# EAGLE board quantum_PSU_V2_1 (EAGLE 9.5.2)
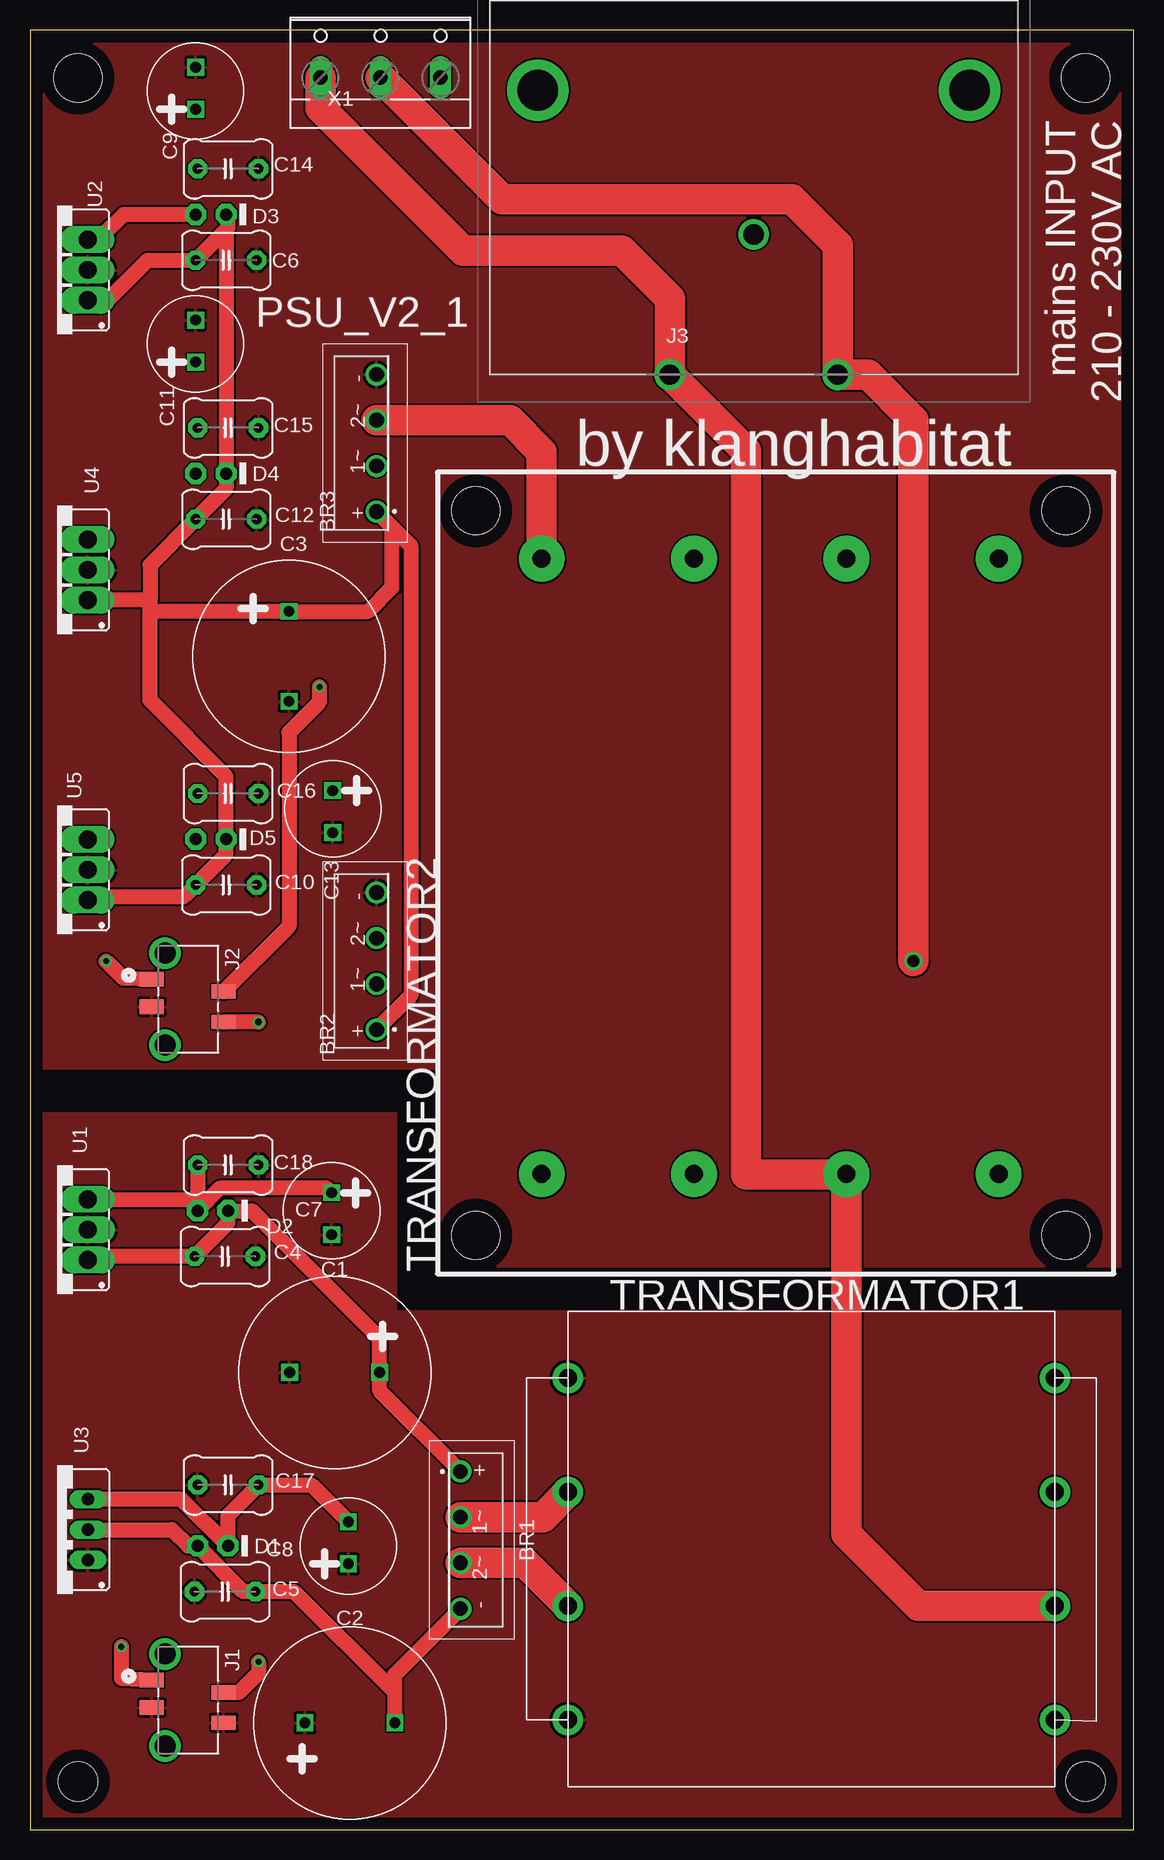
[diagram p0: board, top side]
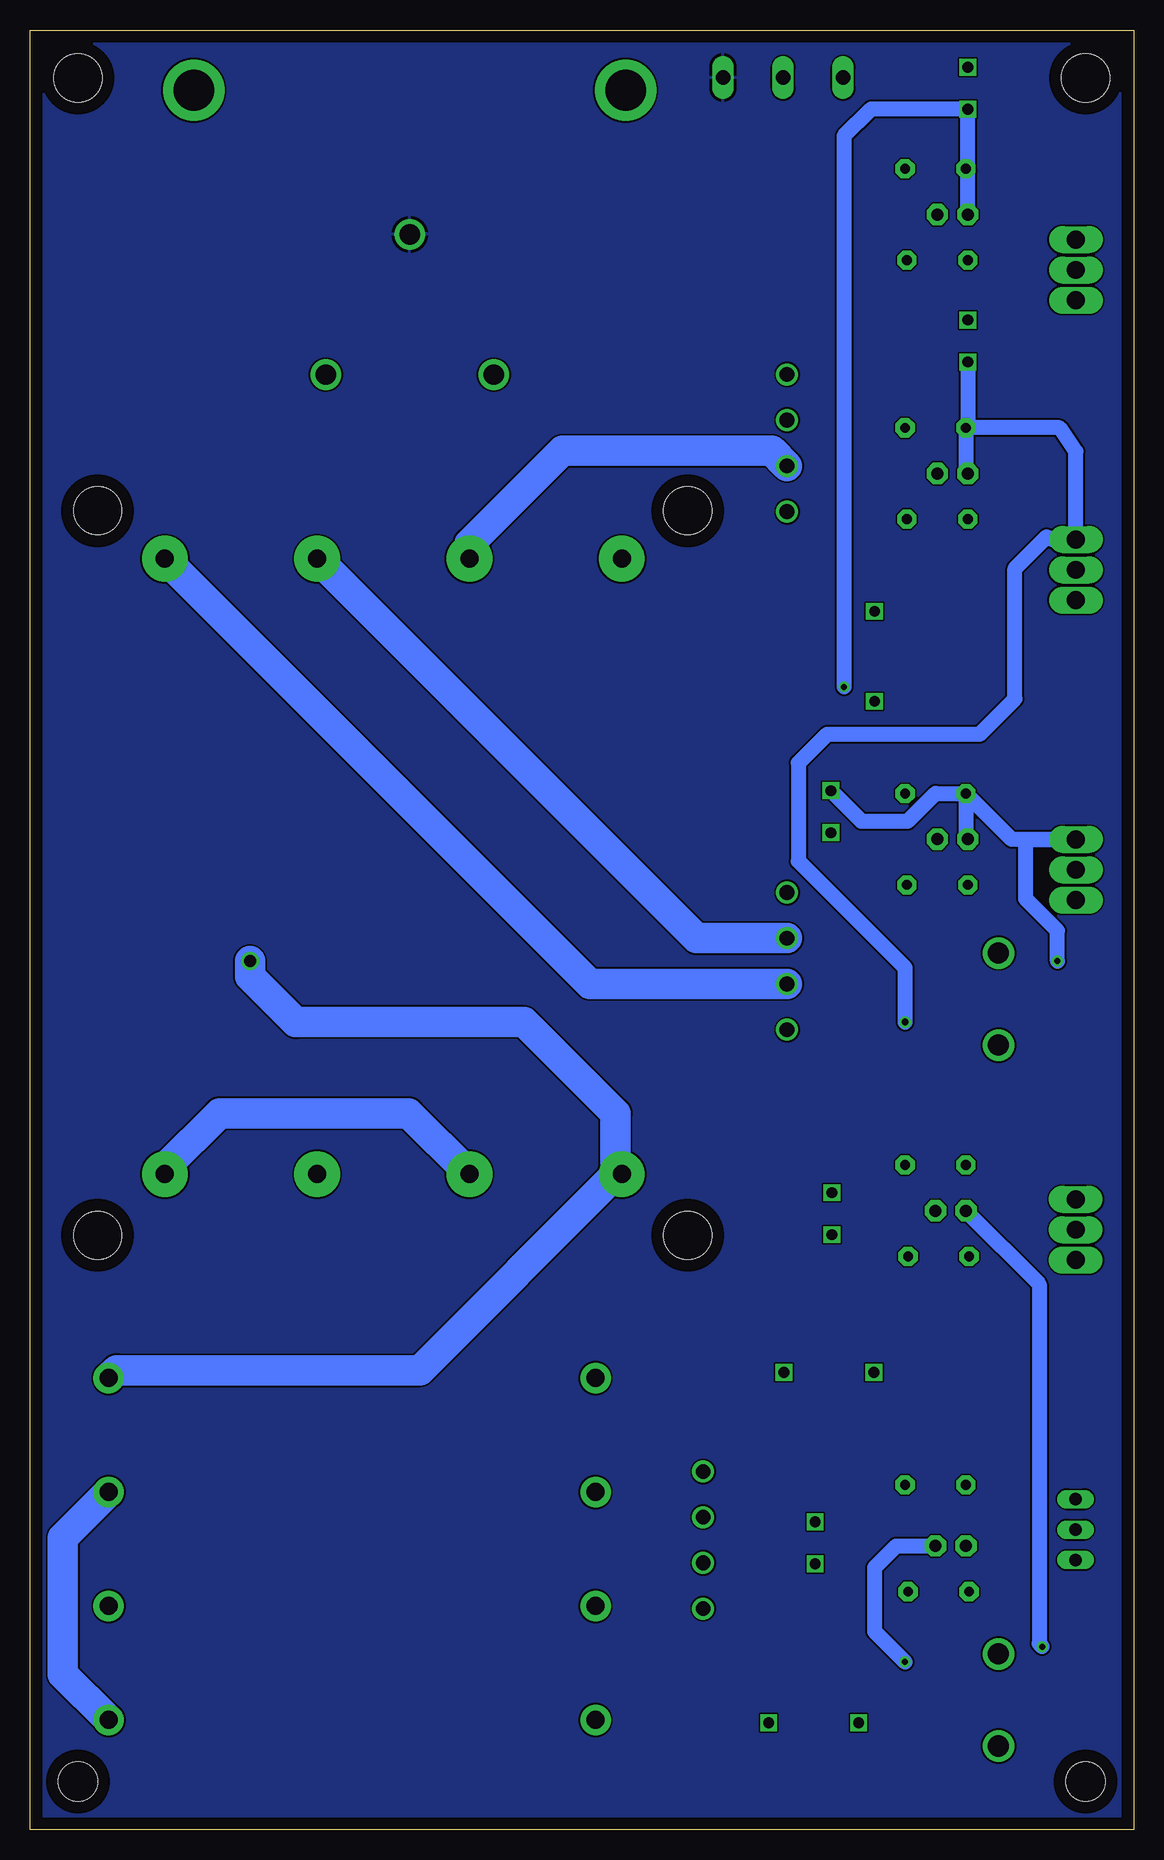
[diagram p1: board, bottom side, seen from below]

Size 92 x 150 mm. Coordinates in mm from the lower left corner, seen from the top.
Outline: 0,0 92,0 92,150 0,150 0,0
Copper layers (1*16): Top 0.035mm / dielectric 1.5mm / Bottom 0.035mm
Design rules "default *": minimum track width 6mil, minimum drill 0.35mm, track to track 6mil, track to pad 6mil, pad to pad 6mil, via to via 6mil, smd to smd 6mil, copper to edge 40mil, drill to drill 6mil, minimum pad ring 10mil, minimum via ring 8mil, stop-mask expansion 4mil, vias tented up to drill 0mil, thermal gap 10mil
Holes 3.3 mm at 4,4 88,4
Holes 4 mm at 4,146 88,146

## Footprints (pad centres in the part's own frame; a part is rotated, then mirrored left to right if it is on the bottom)
KBP308G = drill 1.22 pad 1.83: 1 -5.715,-0.95; 2 -1.905,-0.95; 3 1.905,-0.95; 4 5.715,-0.95
ELECTROLYTIC_16MM = drill 0.9 square: + -3.75,0; - 3.75,0
C5MM = drill 0.813 pad 1.6 octagon: 1 -1.27,0; 2 3.81,0
ELECTROLYTIC_8MM = drill 0.9 square: + -1.5,0; - 2,0
DIODE_THT_STANDING = drill 1 pad 1.778 octagon: A 0,0; C -2.54,0
MOLEX_90814-0204 = smd 1.194 x 2.007: 1 0.254,0; 2 1.27,5.994; 3 2.54,0; 4 3.81,5.994 | drill 1.753 pad 2.629: 5 -1.93,1.092; 6 5.74,1.092
PF0030PC = drill 1.7 pad 2.55: 1 0,0; 2 7,11.7; 3 14,0 | drill 3.4 pad 5.1: MH1 -11,23.7; MH2 25,23.7
LP_SIZE_6 = drill 1.5 pad 2.54: P$1 3.45,34.05; P$2 3.45,24.55; P$3 3.45,15.05; P$4 3.45,5.55; P$5 44.05,34.05; P$6 44.05,24.55; P$7 44.05,15.05; P$8 44.05,5.55
LPI_SIZE_18 = drill 1.5 pad 3.81: P$1 5.1,5.6; P$2 5.1,18.3; P$3 5.1,43.7; P$4 5.1,31; P$5 56.4,5.6; P$6 56.4,18.3; P$7 56.4,43.7; P$8 56.4,31 | hole 4: 0,0; 60.4,0; 0,49.2; 60.4,49.2
78XXS_ = drill 1.499 pad 1.93 long: GND 0,-2.54; IN -2.54,-2.54; OUT 2.54,-2.54
79XXS = drill 1.016 long: GND -2.54,-2.54; IN 0,-2.54; OUT 2.54,-2.54
W237-103 = drill 1.194 long: 1 -5,-1.29; 2 0,-1.29; 3 5,-1.29

## Placement (x,y rotation side)
BR1  BRIDGE_RECTIFIER  [KBP308G]  36.83,24.13 270 top
BR2  BRIDGE_RECTIFIER  [KBP308G]  27.94,72.39 90 top
BR3  BRIDGE_RECTIFIER  [KBP308G]  27.94,115.57 90 top
C1  4700 uF/25 V  [ELECTROLYTIC_16MM]  25.4,38.1 180 top
C2  4700 uF/25V  [ELECTROLYTIC_16MM]  26.67,8.89 0 top
C3  4700 uF/25 V  [ELECTROLYTIC_16MM]  21.59,97.79 270 top
C4  100 nF  [C5MM]  14.99,47.77 0 top
C5  100 nF  [C5MM]  14.99,19.83 0 top
C6  100 nF  [C5MM]  15.08,130.81 0 top
C7  100 uF/25V  [ELECTROLYTIC_8MM]  25.15,51.58 270 top
C8  100 uF/25V  [ELECTROLYTIC_8MM]  26.54,23.64 90 top
C9  100 uF/25V  [ELECTROLYTIC_8MM]  13.81,144.91 90 top
C10  100 nF  [C5MM]  15.08,78.74 0 top
C11  100 uF/25V  [ELECTROLYTIC_8MM]  13.81,123.83 90 top
C12  100 nF  [C5MM]  15.08,109.22 0 top
C13  100 uF/25V  [ELECTROLYTIC_8MM]  25.24,85.09 270 top
C14  100 nF  [C5MM]  15.24,138.43 0 top
C15  100 nF  [C5MM]  15.24,116.84 0 top
C16  100 nF  [C5MM]  15.24,86.36 0 top
C17  100 nF  [C5MM]  15.24,28.72 0 top
C18  100 nF  [C5MM]  15.24,55.39 0 top
D1  4148  [DIODE_THT_STANDING]  13.97,23.64 180 top
D2  4148  [DIODE_THT_STANDING]  13.97,51.58 180 top
D3  4148  [DIODE_THT_STANDING]  13.81,134.62 180 top
D4  4148  [DIODE_THT_STANDING]  13.81,113.03 180 top
D5  4148  [DIODE_THT_STANDING]  13.81,82.55 180 top
J1  90814-0204  [MOLEX_90814-0204]  10.16,12.7 270 top
J2  90814-0204  [MOLEX_90814-0204]  10.16,71.12 270 top
J3  PF0030_PC  [PF0030PC]  53.34,121.27 0 top
TRANSFORMATOR1  PRINTTRAFO2X15@0.4A_SIZE6  [LP_SIZE_6]  88.9,43.18 180 top
TRANSFORMATOR2  PRINTTRAFO2X15V@1.2A_SIZE18  [LPI_SIZE_18]  86.36,49.53 90 top
U1  7815  [78XXS_]  2.29,50 90 top
U2  7812  [78XXS_]  2.27,130 90 top
U3  7915  [79XXS]  2.29,25 90 top
U4  7805  [78XXS_]  2.27,105 90 top
U5  LD1117AV33  [78XXS_]  2.27,80 90 top
X1  [W237-103]  29.21,147.32 0 top

## Library data of the parts
BR1-BR3 = passive components; DESCRIPTION: Bridge Rectifiers Bridge Rectifier KBP; HEIGHT: 3mm; MANUFACTURER_NAME: Diodes Inc.; MANUFACTURER_PART_NUMBER: KBP308G; MOUSER_PART_NUMBER: 621-KBP308G; MOUSER_PRICE-STOCK: https://www.mouser.com/Search/Refine.aspx?Keyword=621-KBP308G
C1-C18 U1-U5 = passive components
D1-D5 = passive components; MOUSER_PART_NUMBER: ...
J1 J2 = electro_mechanical; DESCRIPTION: CONN HEADER 4POS 1.27MM SMD TIN; HEIGHT: mm; MANUFACTURER_NAME: Molex; MANUFACTURER_PART_NUMBER: 90814-0204; MOUSER_PART_NUMBER: 538-90814-0204; MOUSER_PRICE-STOCK: https://www.mouser.com/Search/Refine.aspx?Keyword=538-90814-0204
J3 = electro_mechanical; DESCRIPTION: Bulgin C14 Right Angle Through Hole IEC Plug Male, 10A, 250 V ac; HEIGHT: 35.8mm; MANUFACTURER_NAME: Bulgin; MANUFACTURER_PART_NUMBER: PF0030/PC; MOUSER_PART_NUMBER: 161-PF0030/PC; MOUSER_PRICE-STOCK: https://www.mouser.com/Search/Refine.aspx?Keyword=161-PF0030%2FPC
TRANSFORMATOR1 = passive components; MOUSER_PART_NUMBER: 530-LP-30-200
TRANSFORMATOR2 = passive components; MOUSER_PART_NUMBER: 530-30-600-LPI
X1 = electro_mechanical

## Nets
+3V3_OUT: C13.+ C16.1 D5.A J2.1 U5.OUT
+5V_OUT: C11.+ C15.1 D4.A J2.4 U4.OUT
+12V_OUT: C9.+ C14.1 D3.A J2.2 U2.OUT
+15V_OUT: C7.+ C18.1 D2.A J1.1 U1.OUT
-15V_OUT: C8.- C17.2 D1.C J1.2 U3.OUT
AGND: C1.- C2.+ C4.2 C5.1 C7.- C8.+ C17.1 C18.2 J1.3 J1.4 TRANSFORMATOR1.P$5 TRANSFORMATOR1.P$8 U1.GND U3.GND
CHASSIS: J3.2 X1.3
DGND: BR2.4 BR3.4 C3.- C6.2 C9.- C10.2 C11.- C12.2 C13.- C14.2 C15.2 C16.2 J2.3 U2.GND U4.GND U5.GND
N$1: BR3.3 TRANSFORMATOR2.P$7
N$2: BR2.1 BR3.1 C3.+ C6.1 C10.1 C12.1 D3.C D4.C D5.C U2.IN U4.IN U5.IN
N$3: BR1.3 TRANSFORMATOR1.P$6
N$4: TRANSFORMATOR1.P$1 TRANSFORMATOR1.P$3
N$5: TRANSFORMATOR2.P$1 TRANSFORMATOR2.P$4
N$6: BR3.2 TRANSFORMATOR2.P$8
N$7: BR2.3 TRANSFORMATOR2.P$6
N$8: J3.3 TRANSFORMATOR1.P$4 TRANSFORMATOR2.P$3 X1.2
N$9: J3.1 TRANSFORMATOR1.P$2 TRANSFORMATOR2.P$2 X1.1
N$11: BR1.2 TRANSFORMATOR1.P$7
N$12: BR2.2 TRANSFORMATOR2.P$5
N$15: BR1.1 C1.+ C4.1 D2.C U1.IN
N$17: BR1.4 C2.- C5.2 D1.A U3.IN

## Tracks (layer width: path | path; a pad name or v marks a point on that pad's centre or on a via)
+3V3_OUT  (via drill 0.5)
  Top 1.27: v6.35,72.39 7.79,70.95 J2.1
  Bottom 1.27: C13.+ 22.7,84.05 18.82,84.05 16.51,86.36 C16.1 | C16.1 13.97,82.71 D5.A | v6.35,72.39 6.35,74.93 9,77.58 9,82.31 9.1,82.54 U5.OUT 10.15,82.54 C16.1
+5V_OUT  (via drill 0.55)
  Top 1.27: v19.05,67.31 J2.4
  Bottom 1.27: C15.1 6.16,116.84 4.81,114.86 U4.OUT 6.81,107.54 7.23,107.77 9.89,105.11 9.89,94.25 12.85,91.29 25.55,91.29 27.94,88.9 27.94,80.73 19.05,71.84 v19.05,67.31 | C15.1 13.97,113.19 D4.A | C15.1 13.81,117 C11.+
+12V_OUT  (via drill 0.5)
  Top 1.27: J2.2 21.59,75.29 21.59,91.44 24.13,93.98 v24.13,95.25 | D3.A 7.81,134.62 5.86,132.67 U2.OUT
  Bottom 1.27: v24.13,95.25 24.13,141.17 21.89,143.41 C9.+ D3.A 13.81,138.27 C14.1
+15V_OUT  (via drill 0.5)
  Top 1.27: U1.OUT 13.97,52.54 C18.1 D2.A 15.85,53.46 24.77,53.46 C7.+ | J1.1 7.62,12.57 v7.62,15.24
  Bottom 1.27: v7.62,15.24 7.86,15.48 7.86,45.47 D2.A
-15V_OUT  (via drill 0.5)
  Top 1.27: C8.- 23.46,28.72 C17.2 16.51,26.18 D1.C 12.61,27.54 U3.OUT | J1.2 17.42,11.43 19.05,13.06 v19.05,13.97
  Bottom 1.27: D1.C 19.77,23.64 21.59,21.82 21.59,16.51 v19.05,13.97
AGND
  pour Top: -1.27,59.69 30.48,59.69 30.48,43.18 95.25,43.18 95.25,-1.27 -1.27,-1.27
CHASSIS
  pour Bottom: -2.54,152.4 -2.54,-2.54 96.52,-2.54 96.52,152.4
DGND
  pour Top: -1.27,63.5 34.29,63.5 34.29,46.99 95.25,46.99 95.25,151.13 -1.27,151.13
N$1
  Top 2.54: TRANSFORMATOR2.P$7 42.66,114.82 40.01,117.47 BR3.3
N$2
  Top 1.27: BR2.1 31.75,69.53 31.75,107 BR3.1 30.16,108.58 30.16,103.5 28.2,101.54 C3.+ 10,101.54 | 10,102.46 10,105.41 C12.1 16.35,111.76 D4.C 16.35,133.35 C6.1 | C6.1 16.51,133.51 16.51,134.62 D3.C | 10,101.54 10,102.46 | 10,101.54 10,94.14 16.35,87.79 D5.C 16.35,81.28 C10.1 12.81,77.74 5.37,77.74 U5.IN | 10,102.46 U4.IN | C6.1 9.81,130.81 6.46,127.46 U2.IN
N$3
  Top 2.54: TRANSFORMATOR1.P$6 41.26,22.23 BR1.3
N$4
  Bottom 2.54: TRANSFORMATOR1.P$1 89.25,12.93 89.25,24.33 TRANSFORMATOR1.P$3
N$5
  Bottom 2.54: TRANSFORMATOR2.P$4 60.42,59.69 76.2,59.69 80.76,55.13 TRANSFORMATOR2.P$1
N$6
  Bottom 2.54: TRANSFORMATOR2.P$8 55.36,107.2 47.62,114.94 30.16,114.94 BR3.2
N$7
  Bottom 2.54: TRANSFORMATOR2.P$6 36.42,74.3 BR2.3
N$8  (via drill 1)
  Top 2.54: v73.66,72.39 73.66,117.49 69.88,121.27 J3.3 67.34,132.05 63.5,135.89 39.35,135.89 X1.2
  Bottom 2.54: 43.18,54.61 59.5,38.29 84.79,38.29 TRANSFORMATOR1.P$4 | 43.18,54.61 43.18,59.69 50.8,67.31 69.85,67.31 73.66,71.12 v73.66,72.39 | TRANSFORMATOR2.P$3 43.16,54.63 43.18,54.61
N$9
  Top 2.54: X1.1 24.21,143.49 36.09,131.61 49.35,131.61 53.34,127.62 J3.1 59.69,114.92 59.69,54.61 68.04,54.61 TRANSFORMATOR2.P$2 68.06,24.65 74.08,18.63 TRANSFORMATOR1.P$2
N$11
  Top 2.54: TRANSFORMATOR1.P$7 42.76,26.04 BR1.2
N$12
  Bottom 2.54: BR2.2 45.31,70.48 TRANSFORMATOR2.P$5
N$15
  Top 1.27: BR1.1 29.15,36.58 C1.+ 29.15,40.93 18.5,51.58 D2.C 16.51,50.56 C4.1 5.72,47.77 5.76,47.72 U1.IN
N$17
  Top 1.27: BR1.4 30.42,12.96 C2.- 30.42,11.43 22.02,19.83 C5.2 17.78,19.83 D1.A 13.19,23.64 11.83,25 U3.IN

## Text on the board
tNames: mains INPUT / 210 - 230V AC | PSU_V2_1 | by klanghabitat